# EAGLE board power_uint (EAGLE 5.11)
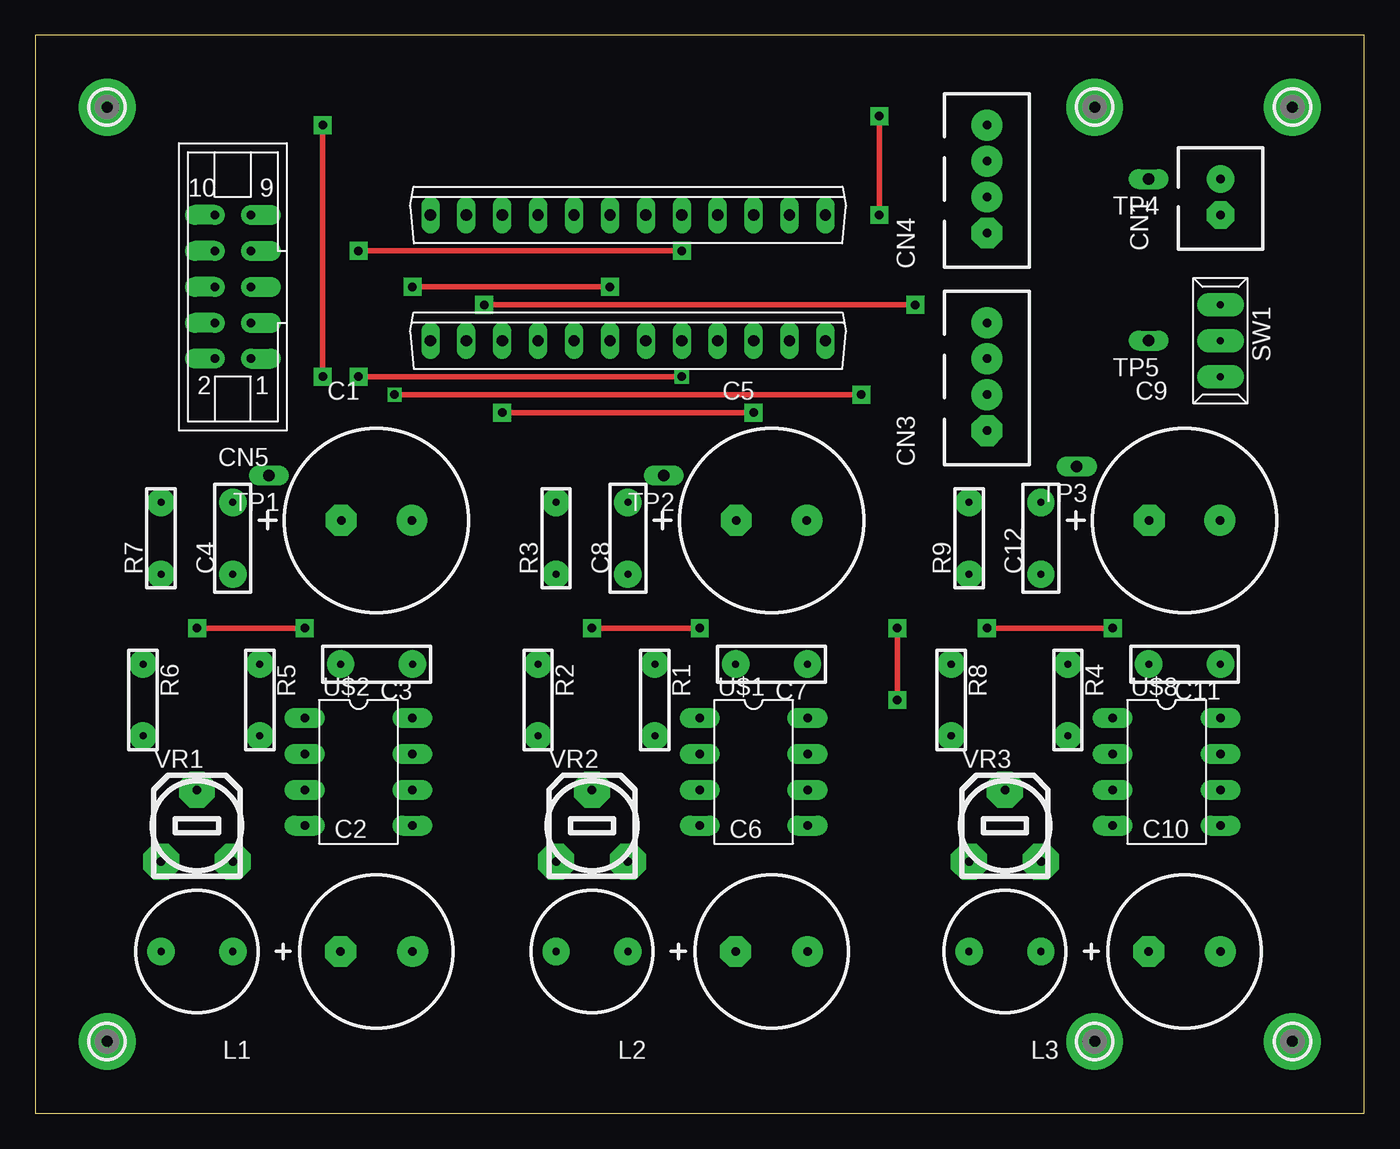
[diagram p0: board, top side]
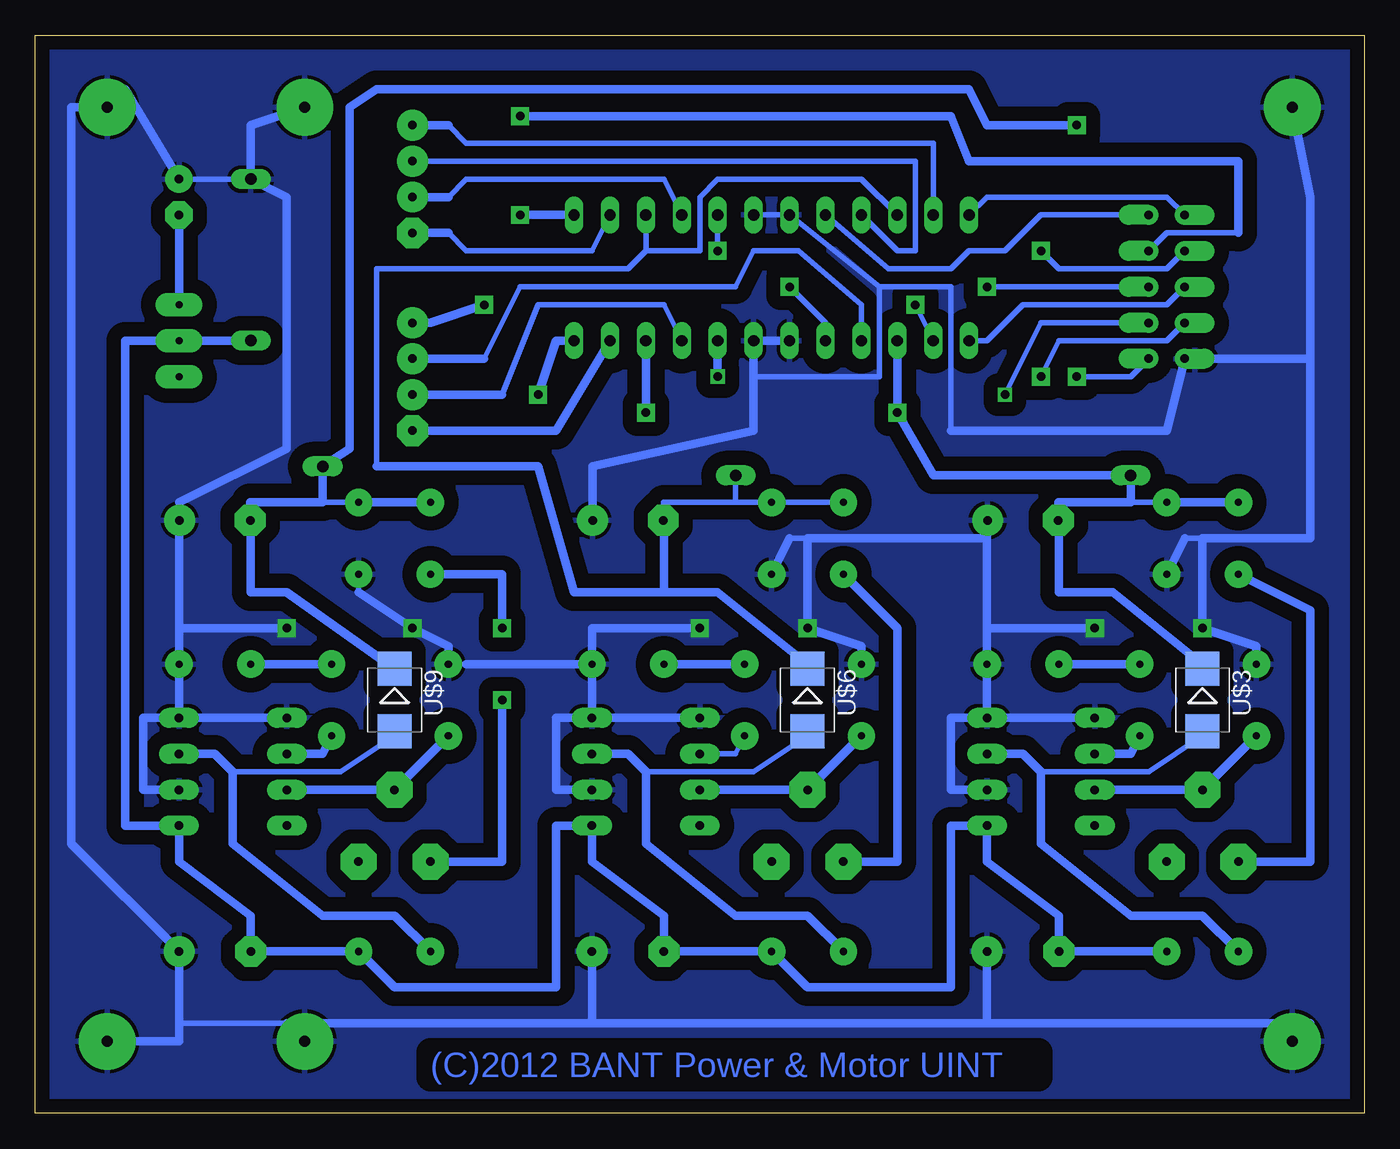
[diagram p1: board, bottom side, seen from below]

Size 93.98 x 76.2 mm. Coordinates in mm from the lower left corner, seen from the top.
Outline: 0,0 93.98,0 93.98,76.2 0,76.2 0,0
Copper layers (1*16): Top 0.035mm / dielectric 1.5mm / Bottom 0.035mm
Design rules "default": minimum track width 10mil, minimum drill 24mil, track to track 8mil, track to pad 8mil, pad to pad 8mil, via to via 8mil, smd to smd 8mil, copper to edge 40mil, drill to drill 8mil, minimum pad ring 10mil, minimum via ring 8mil, stop-mask expansion 4mil, vias tented up to drill 0mil, thermal gap 10mil

## Footprints (pad centres in the part's own frame; a part is rotated, then mirrored left to right if it is on the bottom)
CCAP_13 = drill 0.6 pad 2.184 octagon: + -2.5,0 | drill 0.6 pad 2.184 round: - 2.5,0
CCAP_10.5 = drill 0.6 pad 2.184 octagon: + -2.54,0 | drill 0.6 pad 2.184 round: - 2.54,0
CAP_DIP_2 = drill 0.5 pad 1.93 round: 1 -2.54,0; 2 2.54,0
CON_HRS_DIP_2 = drill 0.6 pad 1.93 octagon: 1 -1.27,0 | drill 0.6 pad 1.93 round: 2 1.27,0
CON_HRS_DIP_4 = drill 0.6 pad 2.184 octagon: 1 -3.81,0 | drill 0.6 pad 2.184 round: 2 -1.27,0; 3 1.27,0; 4 3.81,0
PSCON-10-W = drill 0.6 pad 1.422 offset: P$1 -1.27,5.08; P$2 1.27,5.08; P$3 -1.27,2.54; P$4 1.27,2.54; P$5 -1.27,0; P$6 1.27,0; P$7 -1.27,-2.54; P$8 1.27,-2.54; P$9 -1.27,-5.08; P$10 1.27,-5.08
L_8.5-2 = drill 0.5 pad 1.93 round: 1 -2.54,0; 2 2.54,0
PAD-2.1 = drill 0.8 pad 4 round: B2,1 0,0
R_0.125W_2 = drill 0.5 pad 1.93 round: 1 -2.54,0; 2 2.54,0
DS-3 = drill 0.5 pad 1.676 long: 1 0,-2.54; 2 0,0; 3 0,2.54
TP1-O = drill 0.813 pad 1.422 long: P$1 0,0
DIL08 = drill 0.6 pad 1.422 long: 1 -3.81,-3.81; 2 -1.27,-3.81; 3 1.27,-3.81; 4 3.81,-3.81; 5 3.81,3.81; 6 1.27,3.81; 7 -1.27,3.81; 8 -3.81,3.81
SMB = smd 2.4 x 2.4: A 2.2,0; C -2.2,0
MP4401 = drill 0.8 long: 1 -13.97,0; 2 -11.43,0; 3 -8.89,0; 4 -6.35,0; 5 -3.81,0; 6 -1.27,0; 7 1.27,0; 8 3.81,0; 9 6.35,0; 10 8.89,0; 11 11.43,0; 12 13.97,0
POT_MIDDLE = drill 0.6 pad 2.54 octagon: A -2.54,-2.54; E 2.54,-2.54; S 0,2.54

## Placement (x,y rotation side)
C1  1000u  [CCAP_13]  24.13,41.91 0 top
C2  680u  [CCAP_10.5]  24.13,11.43 0 top
C3  1u  [CAP_DIP_2]  24.13,31.75 180 top
C4  1.5u  [CAP_DIP_2]  13.97,40.64 90 top
C5  1000u  [CCAP_13]  52.07,41.91 0 top
C6  680u  [CCAP_10.5]  52.07,11.43 0 top
C7  1u  [CAP_DIP_2]  52.07,31.75 180 top
C8  1.5u  [CAP_DIP_2]  41.91,40.64 90 top
C9  1000u  [CCAP_13]  81.28,41.91 0 top
C10  680u  [CCAP_10.5]  81.28,11.43 0 top
C11  1u  [CAP_DIP_2]  81.28,31.75 180 top
C12  1.5u  [CAP_DIP_2]  71.12,40.64 90 top
CN1  [CON_HRS_DIP_2]  83.82,64.77 90 top
CN3  [CON_HRS_DIP_4]  67.31,52.07 90 top
CN4  [CON_HRS_DIP_4]  67.31,66.04 90 top
CN5  [PSCON-10-W]  13.97,58.42 180 top
L1  47uH  [L_8.5-2]  11.43,11.43 180 top
L2  47uH  [L_8.5-2]  39.37,11.43 180 top
L3  47uH  [L_8.5-2]  68.58,11.43 180 top
MT1  MOUNT11  [PAD-2.1]  5.08,71.12 0 top
MT2  MOUNT2  [PAD-2.1]  5.08,5.08 0 top
MT3  MOUNT3  [PAD-2.1]  88.9,5.08 0 top
MT4  MOUNT4  [PAD-2.1]  88.9,71.12 0 top
MT5  MOUNT2  [PAD-2.1]  74.93,5.08 0 top
MT6  MOUNT11  [PAD-2.1]  74.93,71.12 0 top
R1  1.2K  [R_0.125W_2]  43.81,29.21 270 top
R2  1.2K  [R_0.125W_2]  35.56,29.21 270 top
R3  4.7K  [R_0.125W_2]  36.83,40.64 90 top
R4  1.2K  [R_0.125W_2]  73.03,29.21 270 top
R5  1.2K  [R_0.125W_2]  15.88,29.21 270 top
R6  1.2K  [R_0.125W_2]  7.62,29.21 270 top
R7  4.7K  [R_0.125W_2]  8.89,40.64 90 top
R8  1K  [R_0.125W_2]  64.77,29.21 270 top
R9  1K  [R_0.125W_2]  66.04,40.64 90 top
SW1  SLIDESW-3  [DS-3]  83.82,54.61 180 top
TP1  TP1  [TP1-O]  16.51,45.09 0 top
TP2  TP1  [TP1-O]  44.45,45.09 0 top
TP3  TP1  [TP1-O]  73.66,45.72 0 top
TP4  TP1  [TP1-O]  78.74,66.04 0 top
TP5  TP1  [TP1-O]  78.74,54.61 0 top
U$1  LT1172CN8  [DIL08]  50.8,24.13 270 top
U$2  LT1172CN8  [DIL08]  22.86,24.13 270 top
U$3  CMS01  [SMB]  11.43,29.21 270 bottom
U$6  CMS01  [SMB]  39.37,29.21 270 bottom
U$8  LT1172CN8  [DIL08]  80.01,24.13 270 top
U$9  CMS01  [SMB]  68.58,29.21 270 bottom
U$11  MP4401  [MP4401]  41.91,54.61 180 top
U$12  MP4401  [MP4401]  41.91,63.5 180 top
VR1  10K  [POT_MIDDLE]  11.43,20.32 0 top
VR2  10K  [POT_MIDDLE]  39.37,20.32 0 top
VR3  10K  [POT_MIDDLE]  68.58,20.32 0 top

## Library data of the parts
C1-C12 CN1 CN3 CN4 L1-L3 MT1-MT6 R1-R9 SW1 TP1-TP5 VR1-VR3 = MyLib
CN5 U$1-U$3 U$6 U$8 U$9 U$11 U$12 = bant

## Nets
4.8V: C2.+ C6.+ C10.+ L1.1 L2.1 L3.1 SW1.2 TP5.P$1 U$1.5 U$2.5 U$8.5
9V: C9.+ C12.2 CN5.P$1 R9.2 TP3.P$1 U$9.C
DRAIN1-1: CN3.1 U$11.2
DRAIN1-2: CN4.1 U$12.2
DRAIN2-1: CN3.2 U$11.4
DRAIN2-2: CN4.2 U$12.4
DRAIN3-1: CN3.3 U$11.9
DRAIN3-2: CN4.3 U$12.9
DRAIN4-1: CN3.4 U$11.11
DRAIN4-2: CN4.4 U$12.11
GND: C1.- C2.- C3.1 C4.1 C5.- C6.- C7.1 C8.1 C9.- C10.- C11.1 C12.1 CN1.2 CN5.P$2 MT1.B2,1 MT2.B2,1 MT3.B2,1 MT4.B2,1 MT5.B2,1 MT6.B2,1 R2.1 R6.1 R8.1 TP4.P$1 U$1.1 U$1.6 U$1.8 U$2.1 U$2.6 U$2.8 U$8.1 U$8.6 U$8.8 U$11.6 U$11.7 U$12.6 U$12.7
N$1: CN1.1 SW1.1
N$2: R1.2 U$1.2
N$3: C7.2 R1.1
N$4: L2.2 U$1.7 U$6.A
N$5: R2.2 U$1.3 VR2.S
N$6: R5.2 U$2.2
N$7: C3.2 R5.1
N$8: L1.2 U$2.7 U$3.A
N$9: R3.1 VR2.A
N$10: R4.2 U$8.2
N$11: R6.2 U$2.3 VR1.S
N$12: C11.2 R4.1
N$13: L3.2 U$8.7 U$9.A
N$14: R8.2 U$8.3 VR3.S
N$15: R7.1 VR1.A
N$16: R9.1 VR3.A
N$17: CN5.P$3 U$11.1
N$18: CN5.P$4 U$11.5
N$19: CN5.P$5 U$11.8
N$20: CN5.P$6 U$11.12
N$21: C1.+ C4.2 R7.2 TP1.P$1 U$3.C U$11.3 U$11.10
N$22: C5.+ C8.2 R3.2 TP2.P$1 U$6.C U$12.3 U$12.10
N$26: CN5.P$7 U$12.1
N$27: CN5.P$8 U$12.5
N$28: CN5.P$9 U$12.8
N$29: CN5.P$10 U$12.12

## Tracks (layer width: path | path; a pad name or v marks a point on that pad's centre or on a via)
4.8V
  Bottom 0.61: L1.1 C2.+ 21.59,13.97 26.67,17.78 U$2.5 29.21,20.32 29.21,8.89 39.37,8.89 L2.1 C6.+ 49.53,13.97 54.61,17.78 U$1.5 57.15,20.32 57.15,8.89 68.58,8.89 L3.1 C10.+ 78.74,13.97 83.82,17.78 U$8.5 87.63,20.32 87.63,54.61 SW1.2 TP5.P$1
9V  (via drill 0.6 pad 1.27)
  Top 0.406: v20.32,52.07 v20.32,69.85
  Bottom 0.406: 73.66,43.18 C12.2 | C9.+ 78.74,41.91 | CN5.P$1 16.51,52.07 v20.32,52.07
  Bottom 0.61: U$9.C 76.2,36.83 78.74,36.83 78.74,41.91 | C12.2 R9.2 | C9.+ 78.78,43.18 73.66,43.18 TP3.P$1 71.75,46.99 71.75,71.12 69.85,72.39 27.94,72.39 26.67,69.85 v20.32,69.85
DRAIN1-1
  Bottom 0.61: U$11.2 57.15,48.26 CN3.1
DRAIN1-2
  Bottom 0.406: U$12.2 54.61,60.96 63.5,60.96 64.77,62.23
  Bottom 0.61: 64.77,62.23 CN4.1
DRAIN2-1
  Bottom 0.406: U$11.4 49.53,57.15 58.42,57.15 60.96,50.8
  Bottom 0.61: 60.96,50.8 CN3.2
DRAIN2-2
  Bottom 0.406: U$12.4 49.53,66.04 63.5,66.04 64.77,64.77
  Bottom 0.61: 64.77,64.77 CN4.2
DRAIN3-1
  Bottom 0.406: U$11.9 35.56,57.15 40.01,60.96 43.18,60.96 44.45,58.42 59.69,58.42 62.23,53.34
  Bottom 0.61: 62.23,53.34 CN3.3
DRAIN3-2
  Bottom 0.406: U$12.9 33.02,60.96 31.75,60.96 31.75,67.31 CN4.3
DRAIN4-1  (via drill 0.6 pad 1.27)
  Top 0.406: v31.75,57.15 v62.23,57.15
  Bottom 0.406: U$11.11 v31.75,57.15
  Bottom 0.61: v62.23,57.15 66.04,55.88 CN3.4
DRAIN4-2
  Bottom 0.406: U$12.11 30.48,68.58 63.5,68.58 64.77,69.85
  Bottom 0.61: 64.77,69.85 CN4.4
GND  (via drill 0.6 pad 1.27)
  Top 0.406: v11.43,34.29 v19.05,34.29 | v39.37,34.29 v46.99,34.29 | v67.31,34.29 v76.2,34.29
  Bottom 0.254: 63.5,31.75 R8.1
  Bottom 0.406: U$12.6 U$12.7 34.29,58.42 | 34.29,58.42 34.29,52.07 43.18,52.07 | 29.21,48.26 29.21,58.42 34.29,58.42 | 39.37,40.64 40.64,40.64 | CN1.2 TP4.P$1 | 71.12,36.83 C12.1 | 11.43,40.64 12.7,40.64 | 83.82,6.35 76.2,6.35 MT5.B2,1
  Bottom 0.61: MT3.B2,1 83.82,5.08 83.82,6.35 C10.- 91.44,19.05 91.44,71.12 MT4.B2,1 87.63,72.39 CN1.2 | MT1.B2,1 3.81,64.77 3.81,53.34 | U$11.7 U$11.6 43.18,52.07 43.18,48.26 54.57,45.72 C5.- | 29.21,48.26 13.97,48.26 CN5.P$2 3.81,53.34 | 40.64,40.64 C8.1 | 12.7,40.64 C4.1 | U$2.6 29.21,22.86 29.21,27.94 U$2.8 | U$2.8 U$2.1 | U$2.8 C3.1 26.67,34.29 | 26.67,34.29 26.67,40.64 | 26.67,40.64 39.37,40.64 v39.37,34.29 35.56,33.02 R2.1 | 26.67,40.64 C1.- | U$8.8 U$8.1 | U$8.6 86.36,22.86 86.36,27.94 U$8.8 | U$8.8 C11.1 83.82,34.29 | 83.82,34.29 83.82,40.64 C9.- | U$1.8 U$1.1 | C7.1 U$1.8 | R6.1 7.62,33.02 v11.43,34.29 11.43,40.64 3.81,40.64 3.81,53.34 | v46.99,34.29 54.61,34.29 C7.1 | R8.1 64.77,33.02 v67.31,34.29 71.12,36.83 | U$1.6 57.15,22.86 57.15,27.94 U$1.8 | C7.1 63.5,31.75 | 83.82,43.18 76.2,46.99 76.2,64.77 TP4.P$1 78.74,69.85 MT6.B2,1 | MT2.B2,1 3.81,6.35 26.67,6.35 | 26.67,6.35 54.61,6.35 | 54.61,6.35 76.2,6.35 | 54.61,6.35 C6.- | 26.67,6.35 C2.- | v19.05,34.29 26.67,34.29 | v76.2,34.29 83.82,34.29
  pour Bottom (isolate 1.016): 0,76.2 0,0 93.98,0 93.98,76.2
N$1
  Bottom 0.61: SW1.1 CN1.1
N$2
  Bottom 0.406: U$1.2 44.45,25.4 R1.2
N$3
  Bottom 0.61: R1.1 C7.2
N$4
  Bottom 0.254: 39.37,26.67 U$6.A
  Bottom 0.406: 39.37,26.67 43.18,24.13 50.8,24.13
  Bottom 0.61: U$1.7 52.07,25.4 50.8,24.13 50.8,19.05 44.45,13.97 39.37,13.97 L2.2
N$5
  Bottom 0.61: U$1.3 VR2.S R2.2
N$6
  Bottom 0.61: U$2.2 16.51,25.4 R5.2
N$7
  Bottom 0.61: R5.1 C3.2
N$8
  Bottom 0.254: 11.43,26.67 U$3.A
  Bottom 0.406: 11.43,26.67 15.24,24.13 22.86,24.13
  Bottom 0.61: U$2.7 24.13,25.4 22.86,24.13 22.86,19.05 16.51,13.97 11.43,13.97 L1.2
N$9
  Bottom 0.61: R3.1 33.02,34.29 33.02,17.78 VR2.A
N$10
  Bottom 0.61: U$8.2 73.66,25.4 R4.2
N$11
  Bottom 0.61: U$2.3 VR1.S R6.2
N$12
  Bottom 0.61: R4.1 C11.2
N$13
  Bottom 0.254: 68.58,26.67 U$9.A
  Bottom 0.406: 68.58,26.67 72.39,24.13 80.01,24.13
  Bottom 0.61: U$8.7 81.28,25.4 80.01,24.13 80.01,19.05 73.66,13.97 68.58,13.97 L3.2
N$14
  Bottom 0.61: U$8.3 VR3.S R8.2
N$15
  Bottom 0.61: R7.1 3.81,35.56 3.81,17.78 VR1.A
N$16  (via drill 0.6 pad 1.27)
  Top 0.406: v60.96,29.21 v60.96,34.29
  Bottom 0.61: v60.96,34.29 60.96,38.1 R9.1 | v60.96,29.21 60.96,17.78 VR3.A
N$17  (via drill 0.6, 0.6 pad 1.27)
  Top 0.406: v25.4,50.8 v58.42,50.8
  Bottom 0.406: CN5.P$3 22.86,55.88 v25.4,50.8
  Bottom 0.61: v58.42,50.8 57.15,54.61 U$11.1
N$18  (via drill 0.6 pad 1.02, 0.6 pad 1.27)
  Top 0.406: v22.86,52.07 v45.72,52.07
  Bottom 0.406: CN5.P$4 13.97,54.61 21.59,54.61 v22.86,52.07
  Bottom 0.61: v45.72,52.07 U$11.5
N$19  (via drill 0.6 pad 1.27)
  Top 0.406: v26.67,58.42 v40.64,58.42
  Bottom 0.406: CN5.P$5 v26.67,58.42 | v40.64,58.42 38.1,55.88 U$11.8
N$20
  Bottom 0.406: U$11.12 26.67,54.61 24.13,57.15 13.97,57.15 CN5.P$6
N$21  (via drill 0.6 pad 1.27)
  Top 0.406: v33.02,49.53 v50.8,49.53
  Bottom 0.254: U$3.C 11.43,31.75
  Bottom 0.406: 16.51,43.18 C4.2 | 21.59,41.91 C1.+
  Bottom 0.61: 11.43,31.75 17.78,36.83 21.59,36.83 21.59,41.91 | C4.2 R7.2 | v50.8,49.53 U$11.3 | U$11.10 v33.02,49.53 30.48,45.09 TP1.P$1 16.51,43.18 21.63,43.18 C1.+
N$22
  Bottom 0.254: U$6.C 39.37,31.75
  Bottom 0.406: U$12.10 35.56,66.04 45.72,66.04 46.99,64.77 46.99,60.96 50.8,60.96 | R3.2 C8.2 44.45,43.18 | 69.85,45.72 69.85,59.69 52.07,59.69 50.8,60.96 | 49.53,41.91 C5.+ 49.57,43.18 44.45,43.18 | 44.45,43.18 TP2.P$1 | 50.8,60.96 U$12.3
  Bottom 0.61: 39.37,31.75 45.72,36.83 49.53,36.83 | 69.85,45.72 58.42,45.72 55.88,36.83 49.53,36.83 | 49.53,36.83 49.53,41.91
N$26  (via drill 0.6 pad 1.27)
  Top 0.406: v59.69,70.48 v59.69,63.5
  Bottom 0.406: CN5.P$7 13.97,62.23 8.89,62.23
  Bottom 0.61: 8.89,62.23 8.89,67.31 27.94,67.31 29.21,70.48 v59.69,70.48 | v59.69,63.5 U$12.1
N$27  (via drill 0.6 pad 1.27)
  Top 0.406: v22.86,60.96 v45.72,60.96
  Bottom 0.406: CN5.P$8 13.97,59.69 21.59,59.69 v22.86,60.96 | v45.72,60.96 U$12.5
N$28
  Bottom 0.406: U$12.8 33.66,59.69 29.21,59.69 27.94,60.96 25.4,60.96 22.86,63.5 CN5.P$9
N$29
  Bottom 0.406: U$12.12 26.67,64.77 13.97,64.77 CN5.P$10

## Text on the board
Bottom: (C)2012 BANT Power & Motor UINT